# Altium PCB PCB_Awg.PcbDoc (part 2 of 2)
Units mm, origin at the board's own origin, x right, y up, seen from the top; angles counter-clockwise.
Board outline 100 x 100 mm, 2 copper layers (Top Layer, Bottom Layer); 107 components, 76 nets, 298 pads, 59 vias.
Unrouted connection lines stored in the file: 35.
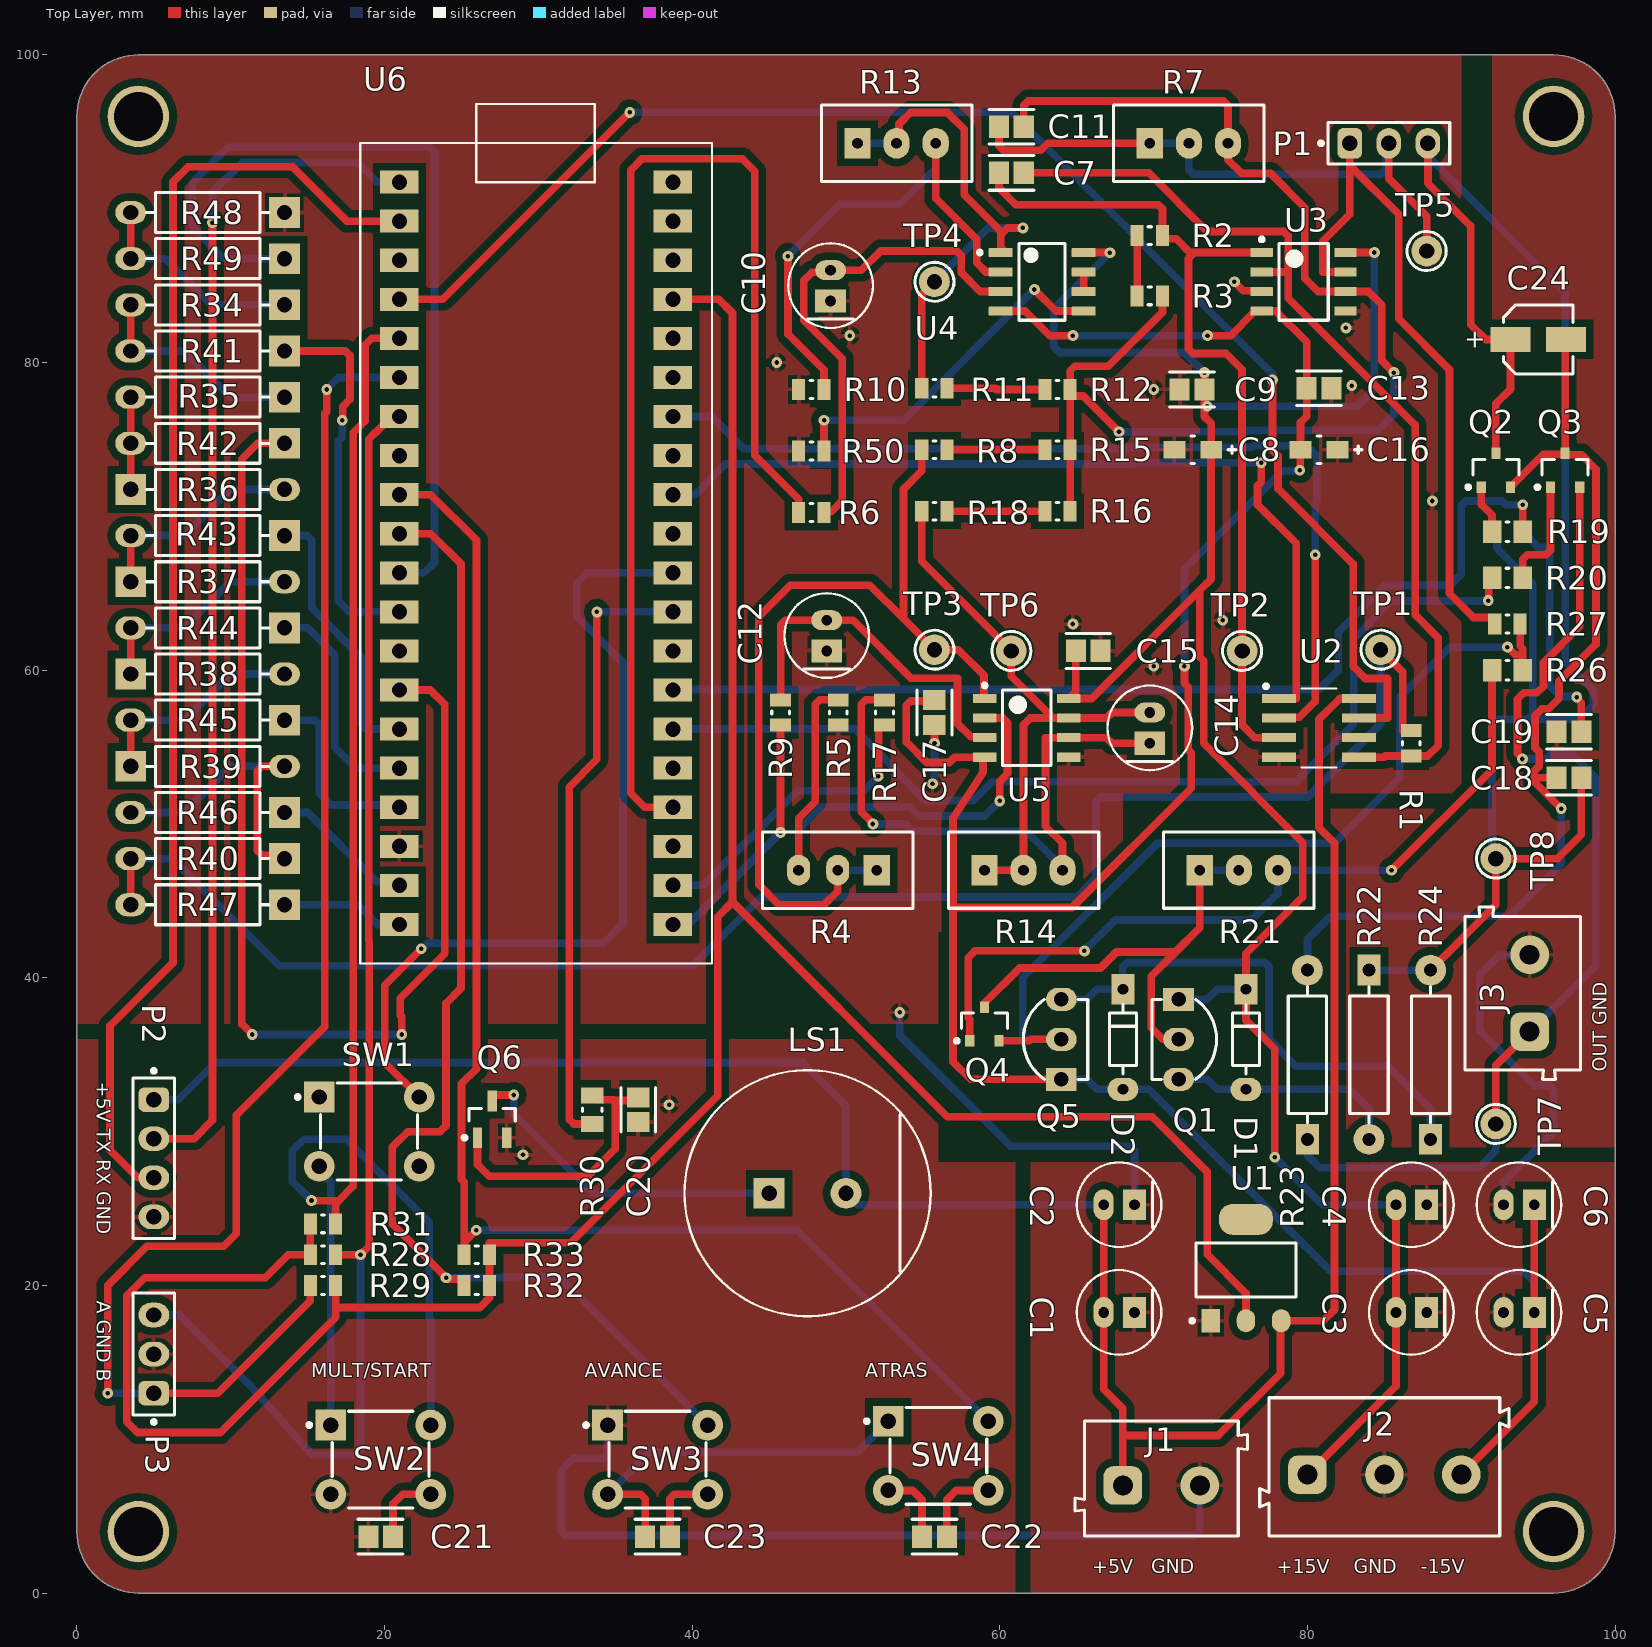
[diagram p0: Top Layer view]

## Via types
v1: diameter 0.7, hole 0.3, Top Layer to Bottom Layer, 59 vias

## Nets (pads, with @x,y where several pads share a name; then routed paths per layer and width w, separated by ;. In a path a pad name is that pad's centre, name@x,y a point inside that pad or via, vN(x,y) a via of type N, cw(c..) or ccw(c..) an arc to the next point about the centre after c; other vN are vias at no path point) (continued)
NetP3_1: (continued)
  Top Layer w0.5: v1(2,13) 2,20 4.551,22.551 9.551,22.551 10.361,23.361 10.361,31.06 16.12,36.819 16.12,76.686 16.25,76.816 v1(16.25,78.25) ; P3.1 9.167,13 15.175,19.008 R29.1
  Bottom Layer w0.5: v1(2,13) P3.1 ; v1(16.25,78.25) 17.03,79.03 U6.GP4
NetP3_3: P3.3 R28.1 U6.GP5 | length 87.6
  Top Layer w0.5: R28.1 16.825,21.993 v1(18.438,21.993) 19,22.555 19,42.379 18.97,42.409 18.97,75.011 19.409,75.45 19.43,75.45 20.47,76.49 U6.GP5
  Bottom Layer w0.5: P3.3 6.67,18.08 11.29,13.46 11.307,13.442 15.161,9.165 15.327,9 15.533,9 18.145,9 18.438,9.293 v1(18.438,21.993)
NetQ1_2: Q1.2 Q4.3 R21.1 R21.2 | length 30.2
  Top Layer w0.5: Q4.3 59,38.35 61.286,40.636 66.546,40.636 67.587,41.678 71.422,41.678 ; Q1.2 70.598,36 69.848,36.75 69.848,40.103 71.422,41.678 ; R21.1 73,43.255 71.422,41.678
  Bottom Layer w0.5: R21.1 R21.2
NetQ2_1: Q2.1 R19.1 | length 3.2
  Top Layer w0.5: Q2.1 91.3,70.775 92,70.075 R19.1
NetQ3_1: Q3.1 R20.1 | length 7.4
  Top Layer w0.5: R20.1 94,67.207 94.293,67.5 95.507,67.5 95.8,67.793 Q3.1
NetQ4_1: Q4.1 R21.3 R26.2 | length 51.9
  Top Layer w0.5: Q4.1 58.05,37.314 57.95,37.414 57.95,41.309 58.391,41.75 v1(65.5,41.75) ; v1(85.464,47) 92,53.536 R26.2
  Bottom Layer w0.5: v1(65.5,41.75) 67.51,43.76 76.35,43.76 78.08,45.49 R21.3 v1(85.464,47)
NetQ4_2: Q4.2 Q5.2 R26.1 R27.2 | length 58.7
  Top Layer w0.5: Q4.2 61.923,35.9 62.023,36 Q5.2 ; v1(93,61.5) 93.013,61.5 93.513,61 94,61 ; R26.1@93.643,60.475 93.65,60.475 R26.1@94,60.125 ; R27.2 93.825,61.563 94,61.388 94,61 ; R26.1 R26.1@94,60.125 ; R26.1@94,60.125 94,61
  Bottom Layer w0.5: Q5.2 61.793,36 61.5,36.293 61.5,40 70.25,48.75 81.75,48.75 86,53 86,58.25 89.25,61.5 v1(93,61.5)
NetR2_2: R2.2 R3.1 | length 3.9
  Top Layer w0.5: R3.1 R2.2
NetR4_1: R4.1 R4.2 R8.1 TP3.1 U5.1 | length 58.3
  Top Layer w0.5: R4.2 49.46,45.64 48.571,44.751 45.641,44.751 44.321,46.072 44.321,63.471 46.378,65.528 51.552,65.528 53.744,63.336 ; R8.1 54.925,72.958 53.744,71.777 53.744,63.336 ; U5.1 58.976,58.155 58.976,59.654 57.3,61.33 TP3.1 53.744,63.336
  Bottom Layer w0.5: R4.2 R4.1
NetR4_3: R4.3 R5.2 U5.2 | length 36.7
  Top Layer w0.5: R4.3 46.92,50.373 48,51.453 48,57.782 48.293,58.075 R5.2 ; U5.2 60.207,56.885 60.52,56.572 60.52,53.734 60.5,53.714 60.5,53.265 60,52.765 v1(60,51.5)
  Bottom Layer w0.5: R4.3 46.92,49.636 48.384,51.1 54.176,51.1 54.753,50.523 59.023,50.523 v1(60,51.5)
NetR10_2: R10.2 R13.3 U4.2 | length 33.9
  Top Layer w0.5: v1(46.226,86.915) 46.226,81.86 48.575,79.511 R10.2 ; R13.3 55.83,90.67 58.5,88 58.5,86.488 59.103,85.885 U4.2
  Bottom Layer w0.5: v1(46.226,86.915) 49.604,90.293 53.493,90.293 55.83,92.63 R13.3
NetR11_1: R11.1 R13.1 R13.2 TP4.1 U4.1 | length 34.2
  Top Layer w0.5: R13.2 53.446,94.406 53.446,95.507 54.189,96.25 56.601,96.25 57.681,95.17 57.681,90.907 59.725,88.863 60.069,88.519 60.069,87.431 60.069,87.155 U4.1 U4.1@60.15,87.431 ; R11.1 54.925,84.425 TP4.1 ; 60.069,88.319 60.5,88.75 v1(61.5,88.75)
  Bottom Layer w0.5: R13.1 R13.2 ; TP4.1 59.25,88.75 v1(61.5,88.75)
NetR11_2: R11.2 R12.1 | length 6.4
  Top Layer w0.5: R11.2 59.688,78.33 59.768,78.25 R12.1
NetR19_2: R19.2 U6.GP21 | length 66.3
  Top Layer w0.5: R19.2 v1(94,70.75)
  Bottom Layer w0.5: U6.GP21 38.79,58.75 80.75,58.75 82,60 82,62.469 85.031,65.5 89.25,65.5 90,66.25 90,70.707 90.293,71 92.65,71 92.9,70.75 v1(94,70.75)
NetR20_2: R20.2 U6.GP20 | length 65.2
  Top Layer w0.5: v1(91.75,64.525) 91.788,64.563 91.788,65.788 R20.2
  Bottom Layer w0.5: U6.GP20 50.593,56.17 53.2,53.563 53.2,53.49 55.167,51.523 58.275,51.523 59.502,52.75 79.25,52.75 83,56.5 83,62.055 85.445,64.5 91.725,64.5 v1(91.75,64.525)
NetR30_1: R30.1 U6.GP22 | length 40.3
  Top Layer w0.5: R30.1 32.294,30.5 32.002,30.793 32.002,52.396 33.805,54.2 v1(33.805,63.79)
  Bottom Layer w0.5: v1(33.805,63.79) U6.GP22
NetR34_1: R34.1 R48.2 R49.2 | length 14.2
  Top Layer w0.5: R49.2 R48.2
  Bottom Layer w0.5: R49.2 5.75,86.75 8.75,83.75 R34.1
NetR34_2: R34.2 R35.1 R41.2 | length 14.2
  Top Layer w0.5: R41.2 R34.2
  Bottom Layer w0.5: R41.2 6.983,80.75 9.983,77.75 R35.1
NetR35_2: R35.2 R36.1 R42.2 | length 6
  Top Layer w0.5: R36.1 R42.2 R35.2
NetR36_2: R36.2 R37.1 R43.2 | length 14.2
  Top Layer w0.5: R37.1 R43.2
  Bottom Layer w0.5: R43.2 6.983,68.75 9.983,71.75 R36.2
NetR37_2: R37.2 R38.1 R44.2 | length 14.2
  Top Layer w0.5: R38.1 R44.2
  Bottom Layer w0.5: R44.2 6.983,62.75 9.983,65.75 R37.2
NetR38_2: R38.2 R39.1 R45.2 | length 14.2
  Top Layer w0.5: R39.1 R45.2
  Bottom Layer w0.5: R45.2 6.983,56.75 9.983,59.75 R38.2
NetR39_2: R39.2 R40.1 R46.2 | length 20.3
  Top Layer w0.5: R40.1 13.293,47.957 12.043,47.957 11.732,48.268 11.732,53.457 12.025,53.75 R39.2
  Bottom Layer w0.5: R46.2 6.983,50.75 9.983,53.75 R39.2
NetR50_2: R50.2 U4.5 | length 23
  Top Layer w0.5: R50.2 v1(48.575,76.247) ; v1(62.25,84.75) 63.655,83.345 U4.5
  Bottom Layer w0.5: v1(48.575,76.247) 53.747,76.247 v1(62.25,84.75)
NetSW1_A': SW1.A' SW2.A | length 17.1
  Bottom Layer w0.5: SW1.A' 15.75,27.457 16.5,26.707 SW2.A
NetU4_6: U4.6 U4.7 | length 1.3
  Top Layer w0.5: U4.6 U4.7
"Offset 1": R8.2 R15.1 | length 6.3
  Top Layer w0.5: R8.2 R15.1
"Offset 2": R16.1 R18.2 | length 6.3
  Top Layer w0.5: R18.2 R16.1
PWM1: R9.1 U6.GP16 | length 16.5
  Top Layer w0.5: v1(45.743,49.45) 45.743,56.425 R9.1
  Bottom Layer w0.5: U6.GP16 39.763,43.47 v1(45.743,49.45)
PWM2: R17.1 U6.GP17 | length 20
  Top Layer w0.5: v1(52.1,53.108) 52.138,53.146 52.138,56.38 52.093,56.425 R17.1
  Bottom Layer w0.5: U6.GP17 40.703,46.01 46.861,52.168 51.153,52.168 52.093,53.108 v1(52.1,53.108)
PWM3: R6.1 U6.GP18 | length 75.7
  Top Layer w0.5: U6.GP18 36.91,51.09 36,52 36,92.5 36.74,93.24 43.26,93.24 44.067,92.433 44.067,73.975 46.925,71.116 R6.1
RH: C7.2 R2.1 TP2.1 U2.3 U3.1 | length 57.2
  Top Layer w0.5: C7.2 59.944,91.36 61.044,90.261 70.303,90.261 70.575,89.988 70.575,88.218 70.75,88.043 71.457,88.043 72.345,87.155 72.655,87.155 ; U3.1 72.655,87.155 ; U2.3 76.57,55.615 75.75,56.435 TP2.1 75.75,79.539 74.699,80.59 72.553,80.59 72.261,80.883 72.261,86.761 72.5,87 72.655,87.155
RUN: SW1.B U6.RUN | length 55.3
  Top Layer w0.5: SW1.B 20.013,34.487 20.013,39.513 v1(22.386,41.886)
  Bottom Layer w0.5: v1(22.386,41.886) 22.441,41.886 22.804,42.25 34.25,42.25 35.5,43.5 35.5,60.5 32.5,63.5 32.5,65.66 33.17,66.33 U6.RUN
RW: C7.1 R1.2 U2.5 U3.2 | length 63.2
  Top Layer w0.5: C7.1 69.67,92.33 73.485,88.515 78.457,88.515 78.75,88.222 78.75,85.885 78.75,84.185 87,75.935 87,63.59 88.5,62.09 88.5,55.098 87.827,54.425 R1.2 85.066,54.425 84.986,54.345 U2.5 ; U3.2 78.509,85.885 78.661,85.885
RX: P2.3 U6.GP1 | length 84.8
  Top Layer w0.5: P2.3 3.96,27 2.157,28.803 2.157,36.877 6.246,40.966 6.246,91.746 7.232,92.732 14.018,92.732 17.56,89.19 U6.GP1
Salida_Dac: R1.1 R40.2 R47.2 TP1.1 | length 107.8
  Top Layer w0.5: R47.2 R40.2 ; TP1.1 86.2,59.88 86.2,56.075 R1.1
  Bottom Layer w0.5: R40.2 6.193,47.75 13.157,40.786 40.036,40.786 44.5,45.25 61.5,45.25 65,45.25 66.25,46.5 66.25,51.457 66.543,51.75 80,51.75 84.75,56.5 TP1.1
TX: P2.2 U6.GP0 | length 78.1
  Top Layer w0.5: P2.2 7.618,29.54 8.811,30.734 v1(8.811,89.099)
  Bottom Layer w0.5: v1(8.811,89.099) 8.811,91.061 10.75,93 18.25,93 19.52,91.73 U6.GP0
U/D: U2.2 U6.GP28_A2 | length 61.9
  Top Layer w0.5: U2.2 78.2,56.935 79.465,56.935 80.5,57.97 v1(80.5,67.5)
  Bottom Layer w0.5: U6.GP28_A2 41.26,76.49 43.35,74.4 68.206,74.4 68.306,74.5 76.444,74.5 76.534,74.59 79.947,74.59 80.6,73.937 80.6,70.926 80.5,70.826 v1(80.5,67.5)
pads on no net: SW1.A SW1.B' U1.4 U6.3V3 U6.ADC_VREF U6.AGND U6.GND U6.GND2 U6.GND3 U6.GND4 U6.GND5 U6.GND6 U6.GP19 U6.GP26_A0 U6.VBUS U6.VSYS

## Polygon pours and split planes (outlines as drawn)
GND on Bottom Layer (solid, remove dead copper, pour order 34): 57,29 100,29 100,96 ccw(c96,96) 96,100 91,100 91,51 70,51 70,42 57,42
GND on Bottom Layer (solid, remove dead copper, pour order 36): 68,52 90,52 90,100 4,100 ccw(c4,96) 0,96 0,37 56,37 56,42 68,42
GND on Bottom Layer (solid, remove dead copper, pour order 37): 61,0 61,28 56,28 56,36 0,36 0,4 ccw(c4,4) 4,0
GND on Bottom Layer (solid, remove dead copper, pour order 32): 62,0 96,0 ccw(c96,4) 100,4 100,28 62,28
GND on Top Layer (solid, remove dead copper, pour order 40): 57,29 100,29 100,96 ccw(c96,96) 96,100 92,100 92,51 70,51 70,42 57,42
GND on Top Layer (solid, remove dead copper, pour order 42): 68,52 90,52 90,100 4,100 ccw(c4,96) 0,96 0,37 56,37 56,43 68,43
GND on Top Layer (solid, remove dead copper, pour order 43): 61,0 61,28 56,28 56,36 0,36 0,4 ccw(c4,4) 4,0
GND on Top Layer (solid, remove dead copper, pour order 28): 62,0 100,0 100,28 62,28

## Other copper
Top Layer:
  pour cut-out: 96,0 100,0 100,4 cw(c96,4)

## Silkscreen, mask and mechanical layers (free items; w line width, h text height)
Top Overlay:
  text "OUT GND" at 99.752,33.902 h1.52 r90
  text "+5V TX RX GND" at 1,33.25 h1.52 r270
  text "A GND B" at 1,19 h1.52 r270
  text "MULT/START" at 15.25,13.746 h1.52
  text "AVANCE" at 33,13.746 h1.52
  text "ATRAS" at 51.25,13.746 h1.52
  text "+5V   GND" at 66,1 h1.52
  text "+15V    GND    -15V" at 78,1 h1.52
Bottom Overlay:
  text "Generador de Funciones Arbitrarias v1.0" at 56.75,1.213 h2
Mechanical 1:
  the board outline again, w0.254

## Text inside footprints (layer, text, board x,y; h text height)
C24: Top Overlay "+" at 91.6,82 h1.22 r180